# Altium PCB PCB1.PcbDoc
Units mil, origin at the board's own origin, x right, y up, seen from the top; angles counter-clockwise.
Board outline 3500 x 2000 mil, 2 copper layers (Top Layer, Bottom Layer), stack 61.756 mil thick; 25 components, 12 nets, 69 pads, 13 vias.
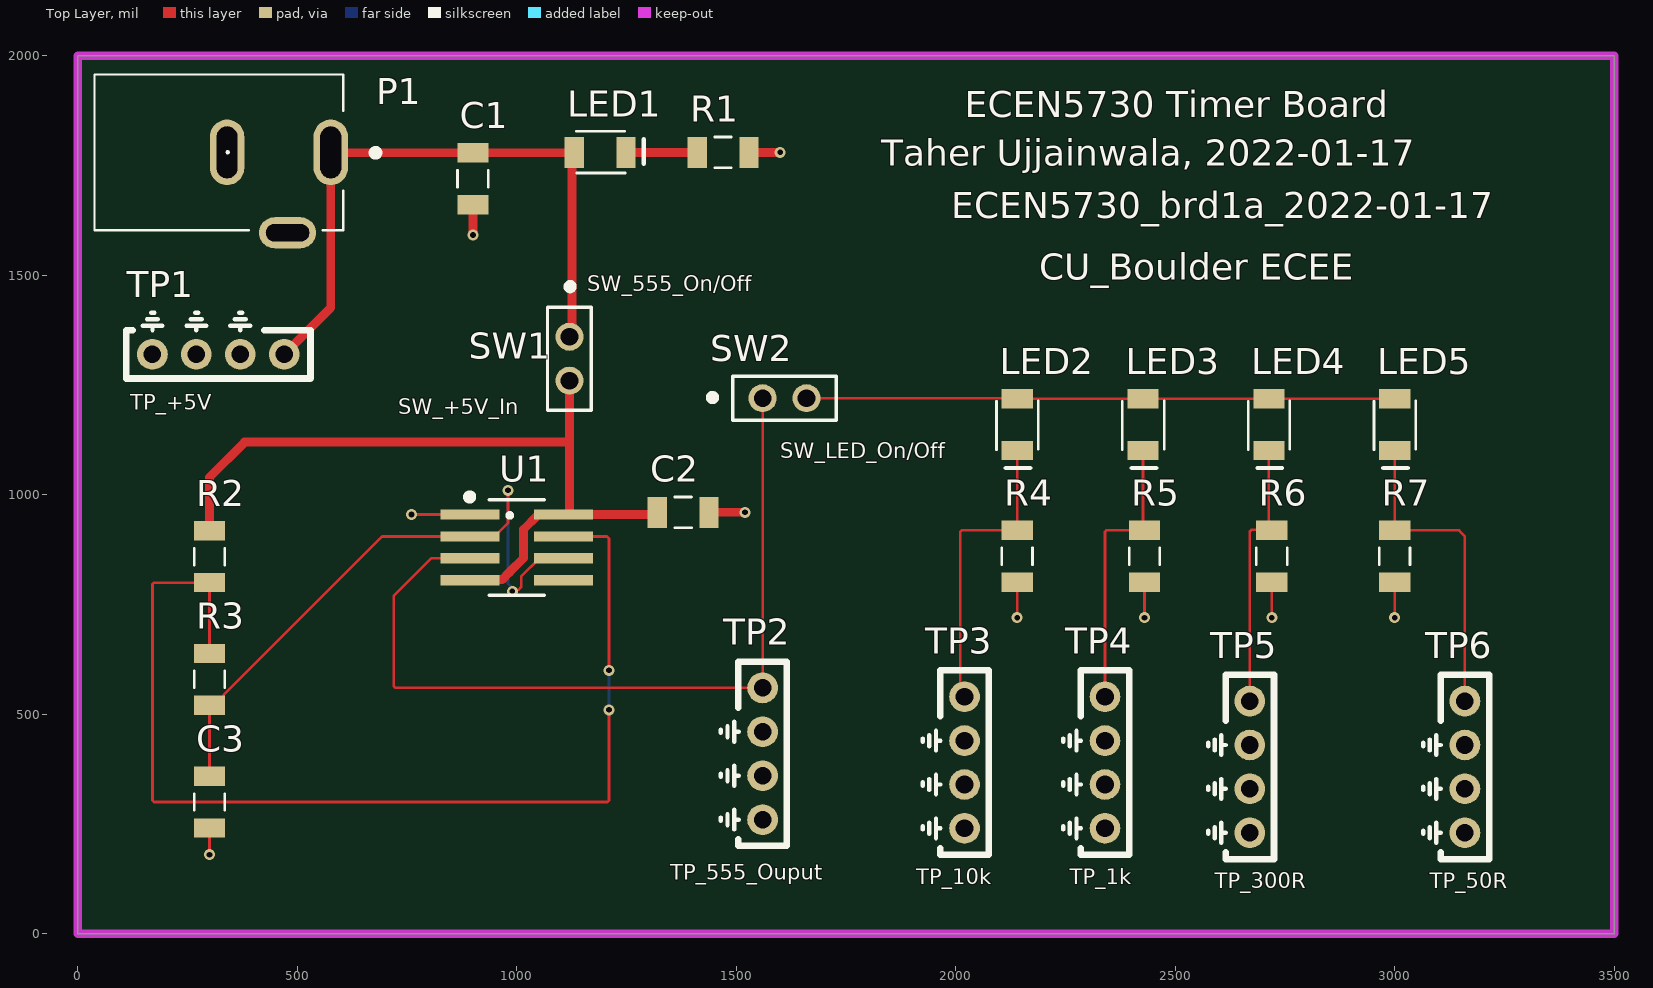
[diagram p0: Top Layer view]
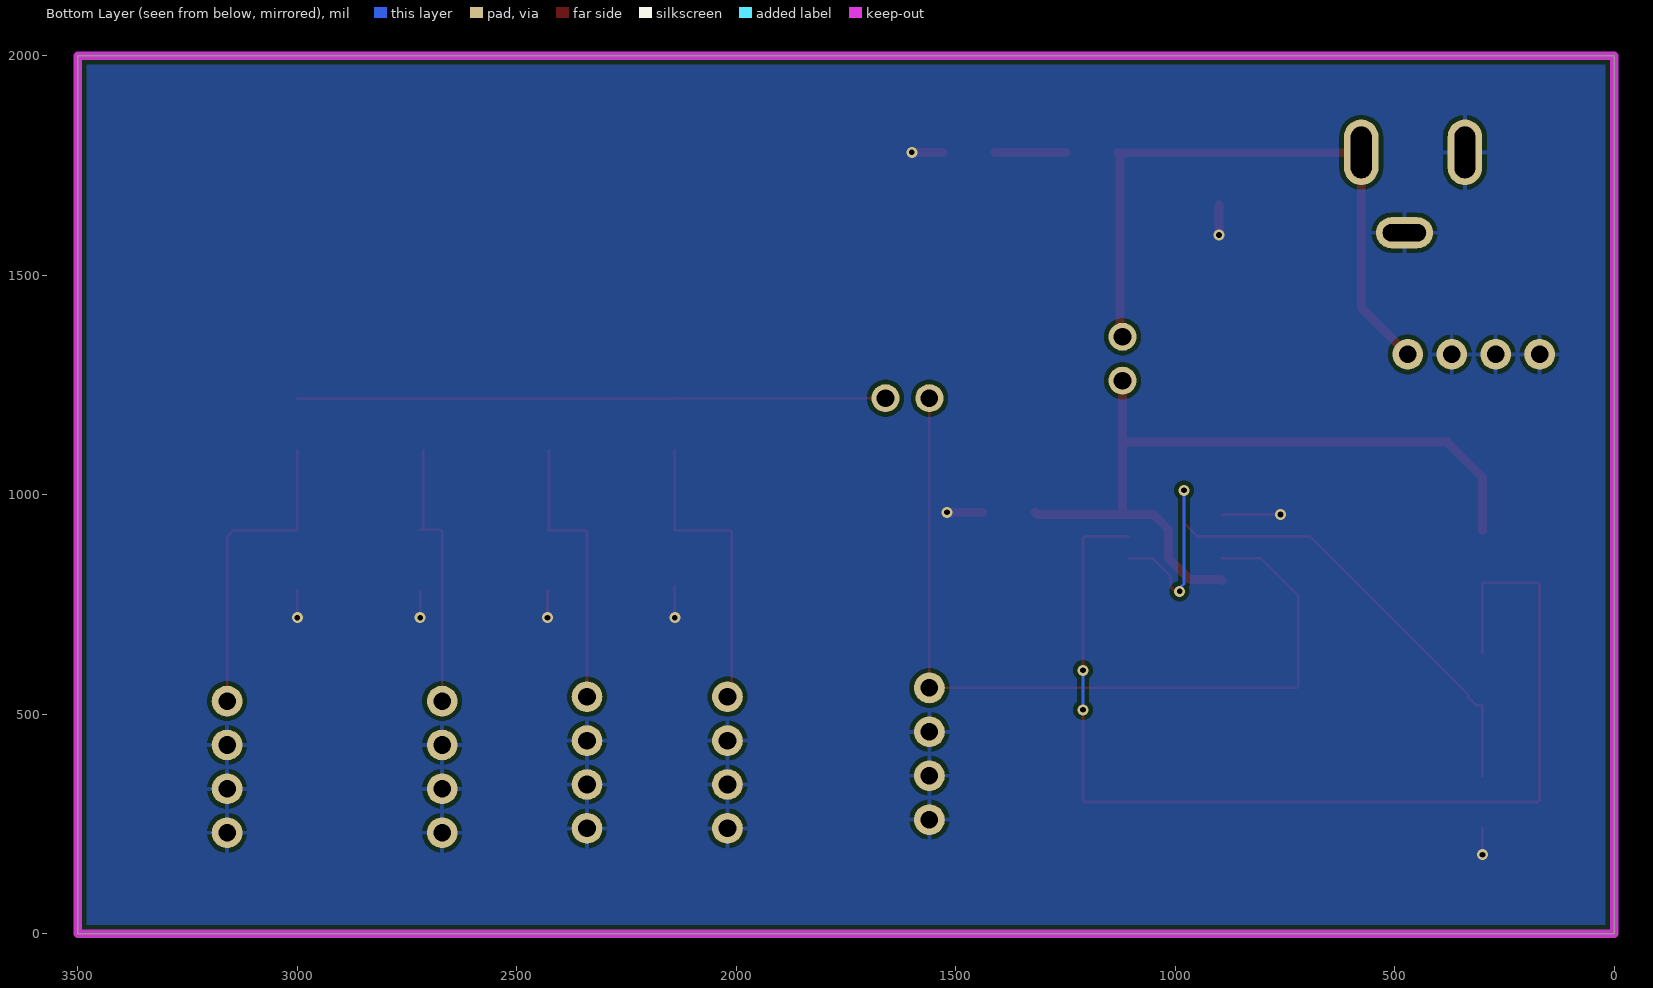
[diagram p1: Bottom Layer view, seen from below]
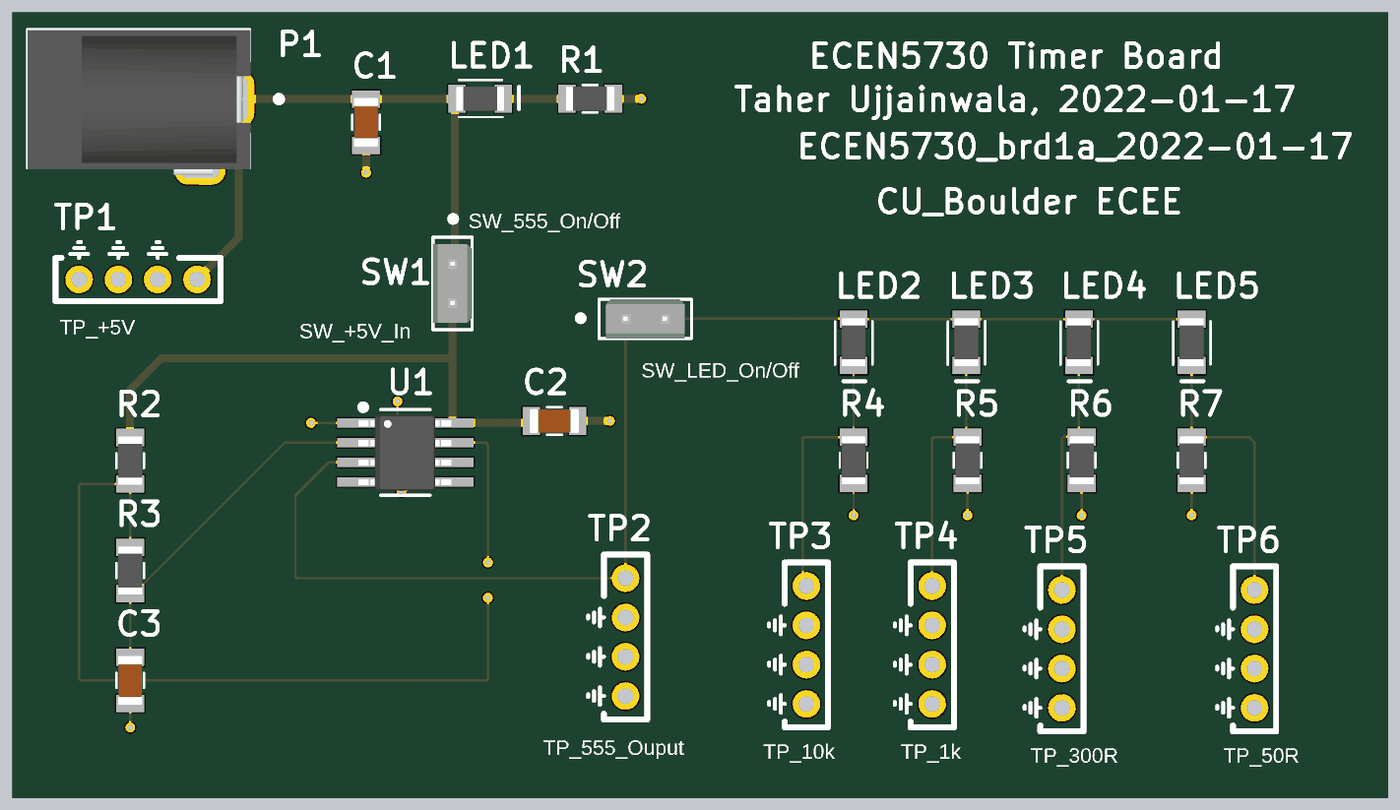
[diagram p2: 3D render of the assembled board from above, using the file's embedded part models]

## Layer stack, top to bottom
Top Solder: solder mask 1, SM-001, Dk 4
Top Layer: signal copper 1.378
Dielectric 1: core 59, Core-043, Dk 4.3
Bottom Layer: signal copper 1.378
Bottom Solder: solder mask 1, SM-001, Dk 4

## Board outline
0,0 3500,0 3500,2000 0,2000

## Design rules (kind name [scope] priority, off if disabled: settings)
BoardOutlineClearance [All] p1: gap=10 ignorepadtopadclearanceinfootprint=FALSE except(0: Arc-SplitContinuation Track-SplitContinuation SMDPad-SplitContinuation THPad-SplitContinuation Via-SplitContinuation Fill-SplitContinuation Poly-SplitContinuation Region-SplitContinuation Text-SplitContinuation)
Clearance [All] p1: gap=10 ignorepadtopadclearanceinfootprint=FALSE except(0: Arc-Hole Track-Hole SMDPad-Hole THPad-Hole Via-Hole Fill-Hole Poly-Hole Region-Hole Text-Hole)
PlaneClearance [All] p1: clearance=10
PlaneConnect [All] p1: planeconnectstyle=Direct reliefexpansion=20 reliefentries=4 reliefconductorwidth=10 reliefairgap=10
PolygonConnect [All] p1: thpad.connectstyle=Relief thpad.reliefconductorwidth=10 thpad.reliefentries=4 thpad.polygonreliefangle="90 Angle" thpad.airgapwidth=10 smdpad.connectstyle=Direct smdpad.reliefconductorwidth=10 smdpad.reliefentries=4 smdpad.polygonreliefangle="90 Angle" smdpad.airgapwidth=10 via.connectstyle=Direct via.reliefconductorwidth=10 via.reliefentries=4 via.polygonreliefangle="90 Angle" via.airgapwidth=10
RoutingVias [All] p1: holewidth=13 width=25 viastyle="Through Hole" minholewidth=13 minwidth=25 maxholewidth=60 maxwidth=80
SolderMaskExpansion [All] p1: expansion=4 istentingtop=FALSE
UnRoutedNet [All] p1: checkbadconnections=TRUE
Width "Schematic Width Constraint_1" [InNet('+5V_555')] p1: maxlimit=100 minlimit=10 preferedwidth=20 minimp=50.000000 maximp=50.000000 favimp=50.000000
Width "Schematic Width Constraint" [InNet('+5V_In')] p2: maxlimit=100 minlimit=10 preferedwidth=20 minimp=50.000000 maximp=50.000000 favimp=50.000000
Width [All] p3: maxlimit=100 minlimit=6 preferedwidth=6 minimp=50.000000 maximp=50.000000 favimp=50.000000
27 further rules are at their usual default settings.

## Components (designator, comment, footprint, x,y, rotation, side; value= is the part's Value field where it differs from the comment)
C1 "22uF" 1206_Passive_Capacitor 900,1720 r90 top
C2 "22uF" 1206_Passive_Capacitor 1379,960 r180 top
C3 "1uF" 1206_Passive_Capacitor 300,300 r90 top
LED1 "Red" LED_1206 1190,1780 r0 top
LED2 "Red" LED_1206 2140,1160 r270 top
LED3 "Red" LED_1206 2426.67,1160 r270 top
LED4 "Red" LED_1206 2713.33,1160 r270 top
LED5 "Red" LED_1206 3000,1160 r270 top
P1 "Power Jack" Power_Jack 576.22,1780 r180 top value="CONN PWR JACK 2X5.5MM SOLDER"
R1 "1k" 1206_Passive_Resitor 1470,1780 r0 top value="1K Ohm"
R2 "1k" 1206_Passive_Resitor 300,859 r90 top value="1K Ohm"
R3 "1k" 1206_Passive_Resitor 300,579.5 r90 top value="1K Ohm"
R4 "1M" 1206_Passive_Resitor 2140,860 r270 top value=10k
R5 "1k" 1206_Passive_Resitor 2430,860 r90 top value=1K
R6 "300" 1206_Passive_Resitor 2720,860 r270 top value=300E
R7 "1M" 1206_Passive_Resitor 3000,860 r270 top value=50E
SW1 "SW_555_On/Off" 2Pin-Header-Conn 1120,1360 r270 top
SW2 "SW_LED_On/Off" 2Pin-Header-Conn 1560,1220 r0 top
TP1 "TP_5V" TP10x_Probe 320,1320 r180 top
TP2 "TP_555_Output" TP10x_Probe 1560,410 r270 top
TP3 "10x Probe TP" TP10x_Probe 2020,390 r270 top
TP4 "10x Probe TP" TP10x_Probe 2340,390 r270 top
TP5 "10x Probe TP" TP10x_Probe 2670,380 r270 top
TP6 "10x Probe TP" TP10x_Probe 3160,380 r270 top
U1 "NE555DR" TS555IDTTR 1000,880 r0 top

## Footprints (in the part's own frame and the unit in brackets; to place one, negate y for a bottom-side part, rotate by r counter-clockwise, add the part's x,y. Pads: shape width x height; smd on the part's side, far side on the other; paste and mask are expansions set on the pad)
2Pin-Header-Conn [mm]
  round 1.62 hole 1.02: 1(0,0) 2(2.54,0)
  silkscreen extent -3.03,-1.27 4.26,1.26, body extent -1.27,-1.27 3.81,1.27, height 8.13
1206_Passive_Capacitor [mil]
  rect 44x71 smd: 1(-59,0) 2(59,0)
  silkscreen extent -19,-35 19,35, body extent -63,-31 63,32, height 50
1206_Passive_Resitor [mil]
  rect 44x71 smd: 1(-59,0) 2(59,0)
  silkscreen extent -19,-35 19,35, body extent -61,-31 61,31, height 26
LED_1206 [mil]
  rect 44x71 smd: 1(-59,0) 2(59,0)
  silkscreen extent -54,-47 99,48, body extent -61,-31 61,31, height 26
Power_Jack [mm]
  oval 2x3.8 hole 1.2 slot 3 at 90 deg: 1(0,0) 2(6,0)
  oval 3.3x1.8 hole 1 slot 2.5 at 0 deg: 3(2.5,4.65)
  silkscreen extent -2.79,-4.5 13.68,4.5, body extent -0.76,-4.45 13.64,4.95, height 11.49
TP10x_Probe [mil] "Small Probs footprint"
  round 70 hole 40: 1(-150,0) 2(-50,0) 2(50,0) 2(150,0)
  silkscreen extent -210,-95 210,55
TS555IDTTR [mm] "IC OSC Single Timer 2.7MHz 8SOIC"
  rect 3.4x0.6 smd: 1(-2.7,1.905) 2(-2.7,0.635) 3(-2.7,-0.635) 4(-2.7,-1.905) 5(2.7,-1.905) 6(2.7,-0.635) 7(2.7,0.635) 8(2.7,1.905)
  silkscreen extent -2.85,-2.77 1.6,3.05, body extent -3.03,-2.48 2.96,2.43, height 1.75

## Part data
C1 C2: library part C_22uF_1206, "22uF ±10% 25V X5R 1206 Multilayer Ceramic Capacitors MLCC - SMD/SMT RoHS", LCSC Part#=C12891, MFR Part #=CL31A226KAHNNNE, Datasheet=https://datasheet.lcsc.com/lcsc/1811031514_Samsung-Electro-Mechanics-CL31A226KAHNNNE_C12891.pdf, Type=Extended
C3: library part C_1uF_1206, "MULTILAYER CERAMIC CAPACITORS MLCC - SMD/SMT 1UF 50V 1206 ROHS", LCSC Part#=C1848, MFR Part #=CL31B105KBHNNNE, Digikey Link=https://www.digikey.com/product-detail/en/C1206C105M4RACTU/399-8150-1-ND/3471873/?itemSeq=304982366, Digikey Part=399-8150-1-ND, Type=Basic
LED1 LED2 LED3 LED4 LED5: library part LED_RED_1206, "Red 621~631nm 1206 Light Emitting Diodes (LED) RoHS", LCSC Part#=C93133, MFR Part #=15-21/R6C-FQ1R1B/2T, Datasheet=https://datasheet.lcsc.com/szlcsc/1811151241_Everlight-Elec-15-21-R6C-FQ1R1B-2T_C93133.pdf, Type=Extended
P1: library part "P_Power Jack", "Power Barrel Connector Jack 2.10mm ID (0.083\"), 5.50mm OD (0.217\") Through Hole, Right Angle", LCSC Part#=C136744, Digikey Link=https://www.digikey.com/product-detail/en/PJ-102A/CP-102A-ND/275425/?itemSeq=304982367, Digikey Part=CP-102A-ND, Type=Extended
R1 R2 R3 R5: library part R_1K_1206, "CHIP RESISTOR - SURFACE MOUNT 1KOHMS ±1% 1/4W 1206 ROHS", LCSC Part#=C4410, MFR Part #=1206W4F1001T5, Digikey Link=https://www.digikey.com/product-detail/en/RNCP1206FTD1K00/RNCP1206FTD1K00CT-ND/2240675/?itemSeq=304982373, Digikey Part=RNCP1206FTD1K00CT-ND, Type=Basic
R4 R7: library part R_1M_1206, "CHIP RESISTOR - SURFACE MOUNT 1MOHMS ±1% 1/4W 1206 ROHS", LCSC Part#=C17927, Digikey Link=https://www.digikey.com/product-detail/en/RMCF1206JT1M00/RMCF1206JT1M00CT-ND/1942830/?itemSeq=304982358, Digikey Part="Number RMCF1206JT1M00CT-ND", Type=Basic
R6: library part R_300Ohm_1206, "CHIP RESISTOR - SURFACE MOUNT 300OHMS ±1% 1/4W 1206 ROHS", LCSC Part#=C17887, MFR Part #=1206W4F3000T5E, Datasheet=https://datasheet.lcsc.com/szlcsc/Uniroyal-Elec-1206W4F3000T5E_C17887.pdf, Type=Basic
SW1 SW2: library part SW_2Pin_100mil_Switch, "2Pin Header", LCSC Part#=C124375, Type=Extended
TP1 TP2 TP3 TP4 TP5 TP6: library part TP_10x_Probe, "Test Point 300 mil centers"
U1: library part U_555_Slow, "555 Timer SOIC-8_150MIL ROHS 150ns Rise Time", LCSC Part#=C7593, Digikey Link=https://www.digikey.com/product-detail/en/texas-instruments/NE555DR/296-6501-1-ND/372490, MFR Part #=NE555DR, Type=Basic

## Via types
v1: diameter 25, hole 13, Top Layer to Bottom Layer, 13 vias

## Nets (pads, with @x,y where several pads share a name; then routed paths per layer and width w, separated by ;. In a path a pad name is that pad's centre, name@x,y a point inside that pad or via, vN(x,y) a via of type N, cw(c..) or ccw(c..) an arc to the next point about the centre after c; other vN are vias at no path point)
555_Output: SW2.1 TP2.1 U1.3 | length 1916.9
  Top Layer w6: U1.3 805,855 720,770 720,563.51 723.51,560 TP2.1 SW2.1
+5V_555: C2.2 R2.2 SW1.2 U1.4 U1.8 | length 1809.9
  Top Layer w20: R2.2 300,1040 380,1120 1120,1120 ; U1.4 895.51,806.81 966.8,806.81 983.18,823.19 1015.33,855.34 1015.33,921.06 1047.46,953.19 1049.37,953.19 1051.18,955 U1.8@1118.19,955 ; SW1.2 1120,1120 ; C2.2 1315,955 U1.8@1118.19,955 ; U1.8@1118.19,955 1120,956.81 1120,1120
+5V_In: C1.2 LED1.1 P1.1 SW1.1 TP1.1 | length 1482.7
  Top Layer w20: TP1.1 576.22,1426.22 P1.1 577.22,1779 C1.2 LED1.1@1130,1779 ; SW1.1 1125.5,1365.5 1125.5,1774.5 LED1.1@1130,1779 ; LED1.1 LED1.1@1130,1779
GND: C1.1 C2.1 C3.1 P1.2 P1.3 R1.2 R4.2 R5.1 R6.2 R7.2 TP1.2 TP2.2 TP3.2 TP4.2 TP5.2 TP6.2 U1.1 | length 711
  Top Layer w6: v1(300,180) C3.1 ; v1(760,955) U1.1 ; v1@2140,710.5 R4.2@2140,791.5 ; v1@2430,710.5 R5.1@2430,781.5 ; v1@2720,710.5 R6.2@2720,781.5 ; v1@3000,710.5 R7.2@3000,781.5
  Top Layer w20: v1(900.03,1591.69) C1.1 ; C2.1 v1(1520,960) ; R1.2 v1(1600,1780)
  other v1: 2140,720 2430,720 2720,720 3000,720
NetC3_2: C3.2 R3.1 U1.2 U1.6 | length 1485.9
  Top Layer w6: C3.2 R3.1 313.5,520.5 332.5,539.5 332.5,544.51 692.99,905 948.82,905 980,936.18 v1(980,1010) ; v1(990,780) 993.64,783.64 1003.64,783.64 1010,790 1010,813.82 1051.18,855 U1.6
  Bottom Layer w6: v1(980,1010) 980,797.03 986.36,790.67 986.36,783.64 v1(990,780)
NetLED1_2: LED1.2 R1.1 | length 162
  Top Layer w20: LED1.2 R1.1
NetLED2_1: LED2.1 LED3.1 LED4.1 LED5.1 SW2.2 | length 1340.4
  Top Layer w6: SW2.2 2139,1220 LED2.1 LED3.1 LED4.1 LED5.1
NetLED2_2: LED2.2 R4.1 TP3.1 | length 693.1
  Top Layer w6: TP3.1 2010,550 2010,915.49 2013.51,919 R4.1 LED2.2
NetLED3_2: LED3.2 R5.2 TP4.1 | length 650.3
  Top Layer w6: TP4.1 2340,915.49 2343.51,919 R5.2 2426.67,922.33 LED3.2
NetLED4_2: LED4.2 R6.1 TP5.1 | length 621.7
  Top Layer w6: TP5.1 2670,916.49 2673.51,920 R6.1@2719,920 ; LED4.2 2713.33,925.67 R6.1@2719,920 ; R6.1 R6.1@2719,920
NetLED5_2: LED5.2 R7.1 TP6.1 | length 723.1
  Top Layer w6: LED5.2 R7.1 3146.49,919 3160,905.49 TP6.1
NetR2_1: R2.1 R3.2 U1.7 | length 2531.1
  Top Layer w6: R3.2 R2.1 173.51,800 170,796.49 170,303.51 173.51,300 1206.49,300 1210,303.51 v1(1210,510) ; U1.7 1205,905 1210,900 v1(1210,600)
  Bottom Layer w6: v1(1210,510) v1(1210,600)
pads on no net: U1.5

## Polygon pours and split planes (outlines as drawn)
GND on Bottom Layer "GND_L02_P001" (solid, pour order 1): 0,2000 3500,2000 3500,0 0,0

## Keep-outs
Keep-Out Layer:
  the board outline again, w20

## Silkscreen, mask and mechanical layers (free items; w line width, h text height)
Top Overlay:
  text "ECEN5730 Timer Board" at 2020,1860 h60
  text "Taher Ujjainwala, 2022-01-17" at 1830,1749.99 h60
  text "ECEN5730_brd1a_2022-01-17" at 1990,1630 h60
  text "CU_Boulder ECEE" at 2190,1490 h60
  text "SW_555_On/Off" at 1160,1450.69 h60
  text "TP_+5V" at 120,1180.69 h60
  text "SW_+5V_In" at 730,1170.69 h60
  text "SW_LED_On/Off" at 1600,1070.69 h60
  text "TP_555_Ouput" at 1350,110.69 h60
  text "TP_10k" at 1910,100.69 h60
  text "TP_1k" at 2260,100.69 h60
  text "TP_300R" at 2590,90.69 h60
  text "TP_50R" at 3080,90.69 h60